# Altium PCB Baseboard.PcbDoc
Units mm, origin at the board's own origin, x right, y up, seen from the top; angles counter-clockwise.
Board outline 88 x 88 mm, 2 copper layers (Top Layer, Bottom Layer); 89 components, 67 nets, 411 pads, 11 vias.
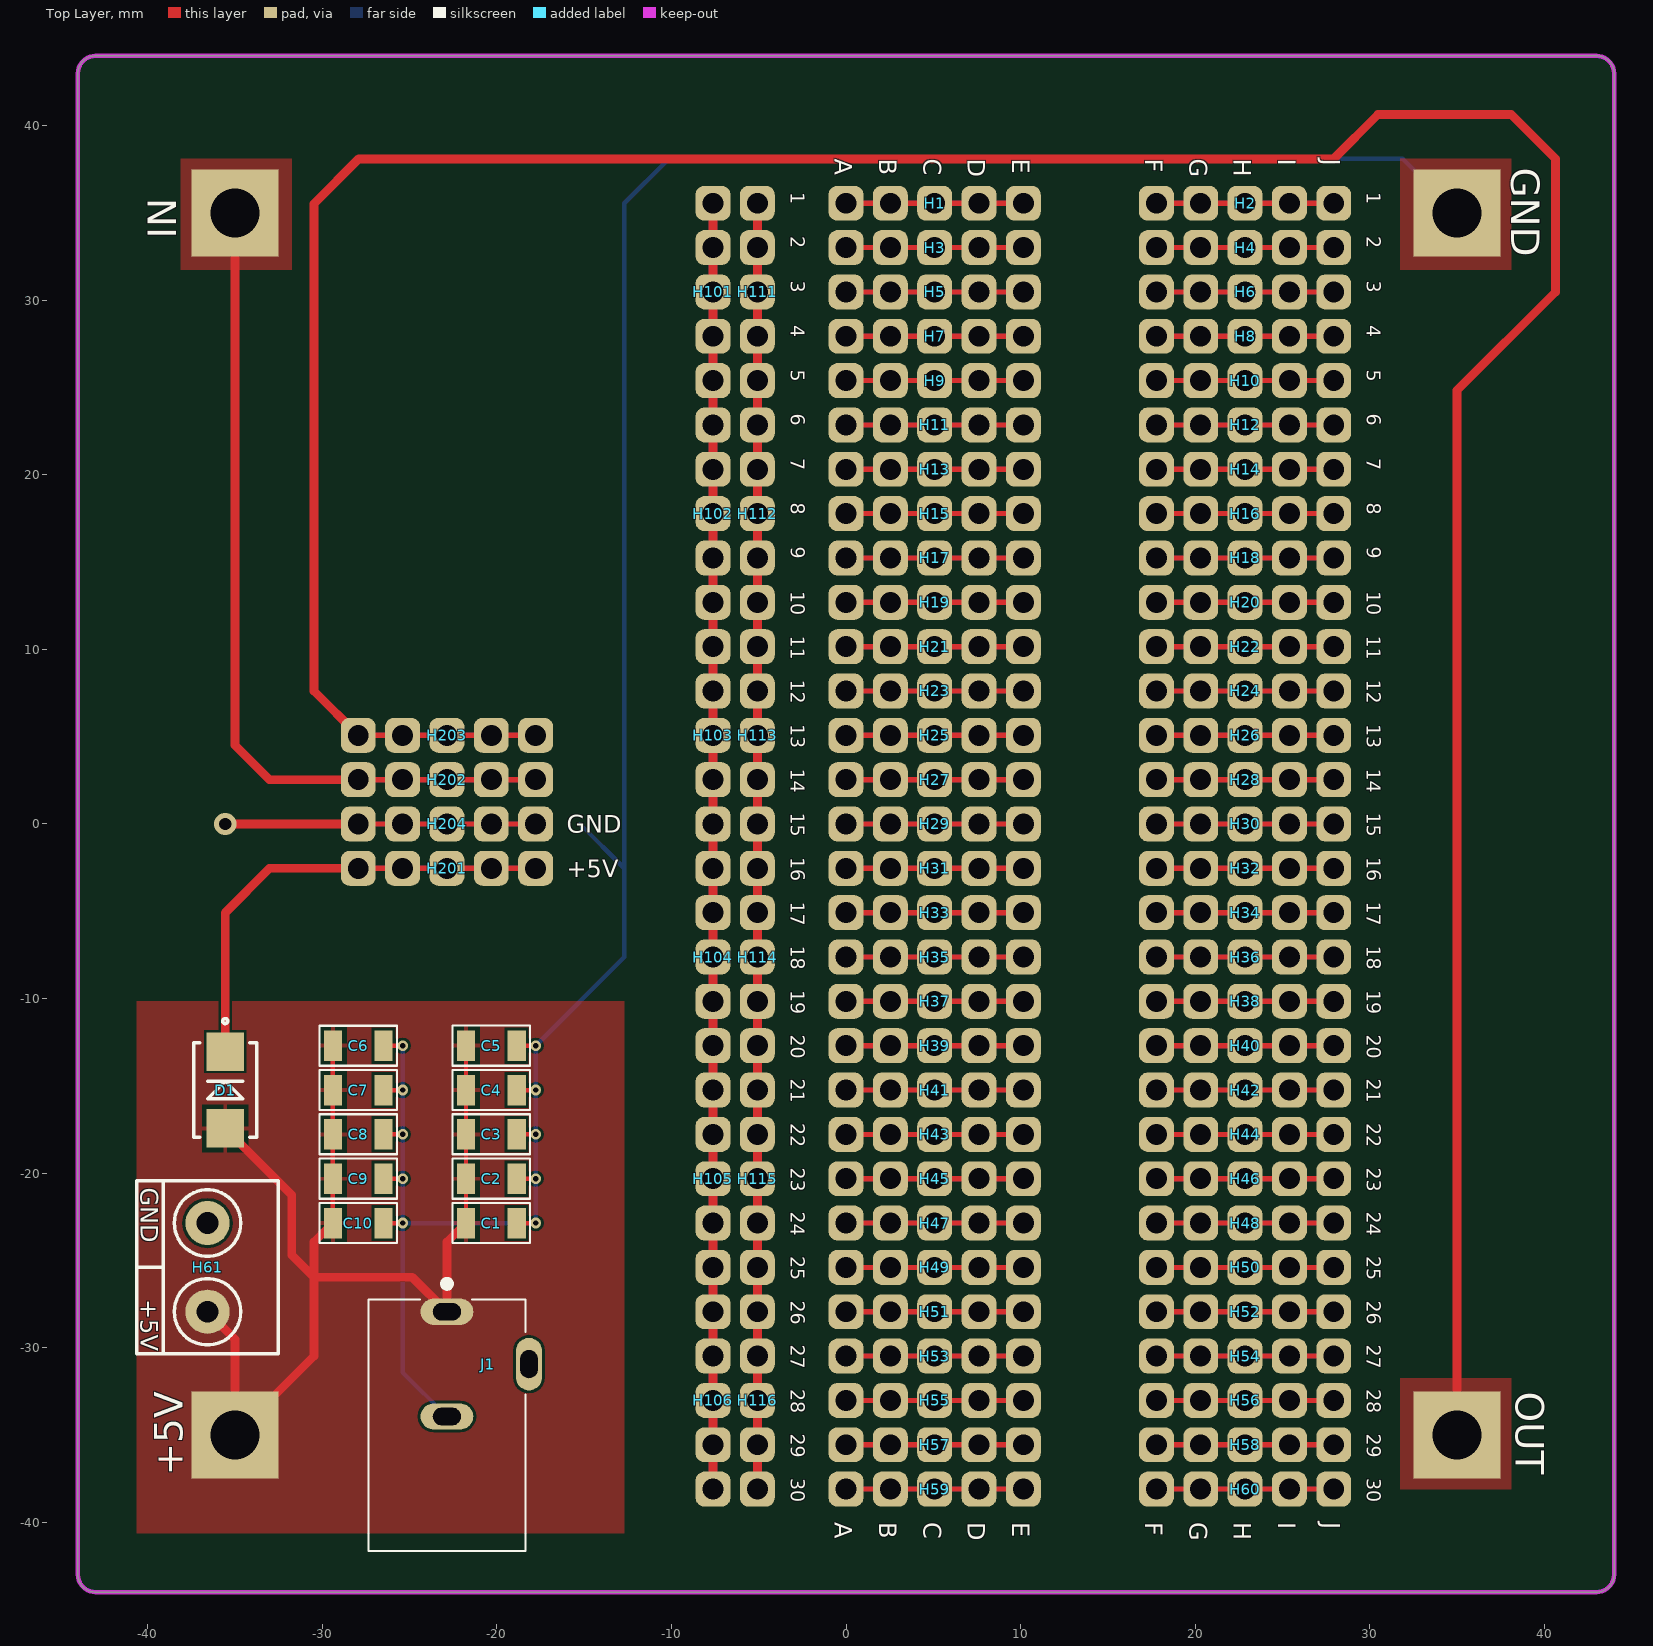
[diagram p0: Top Layer view]
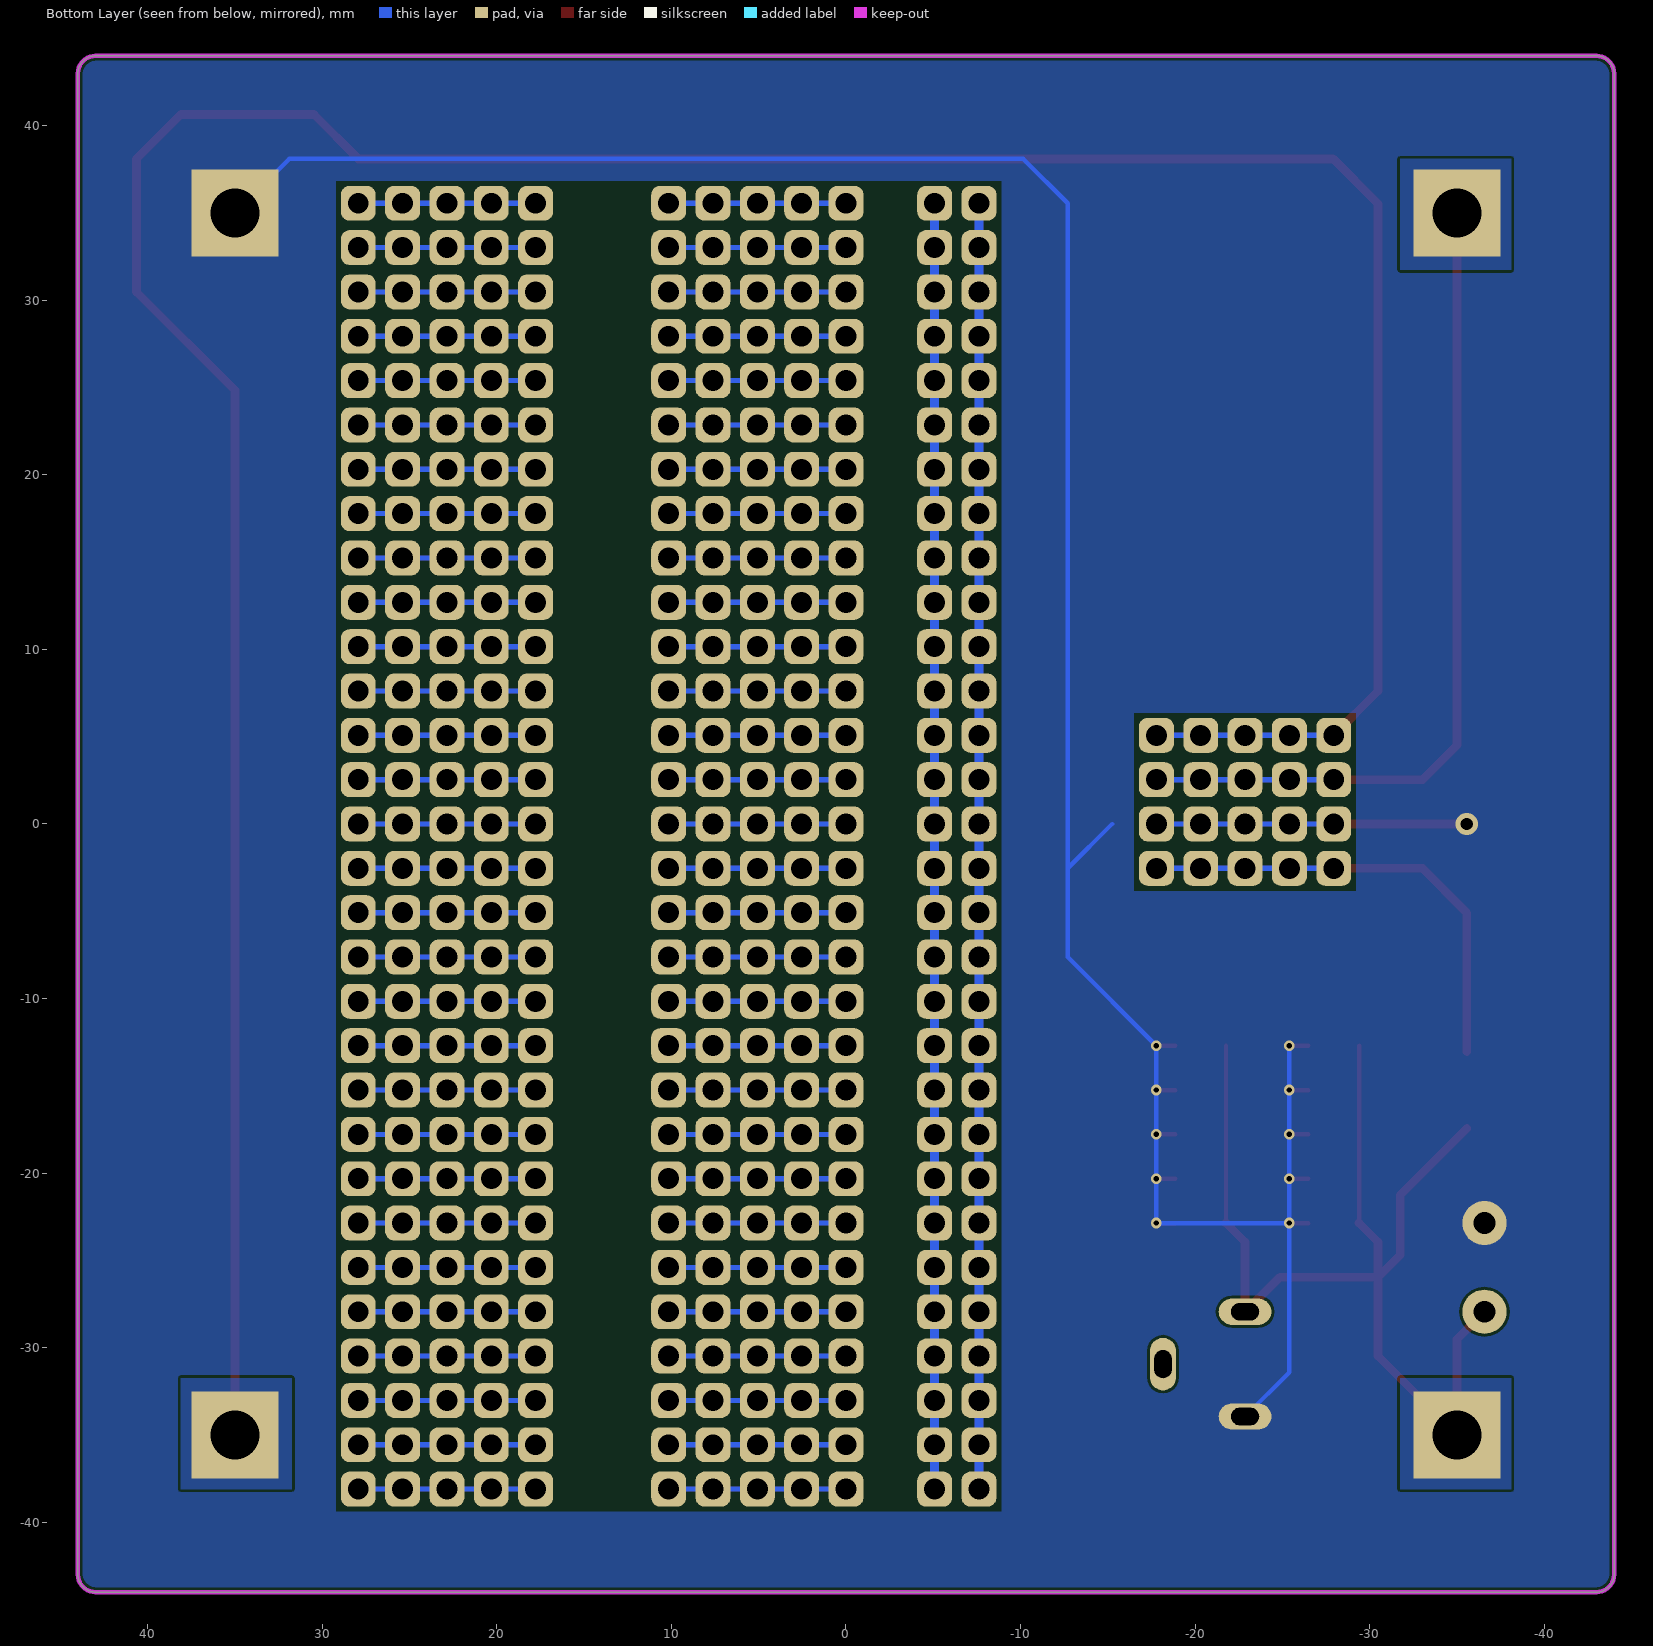
[diagram p1: Bottom Layer view, seen from below]

## Layer stack, top to bottom
Top Solder: solder mask 0.0102, Solder Resist, Dk 3.5
Top Layer: signal copper 0.0356
Dielectric 1: dielectric 0.32, FR-4, Dk 4.8
Bottom Layer: signal copper 0.0356
Bottom Solder: solder mask 0.0102, Solder Resist, Dk 3.5

## Board outline
-44,-43 ccw(c-43,-43) -43,-44 43,-44 ccw(c43,-43) 44,-43 44,43 ccw(c43,43) 43,44 -43,44 ccw(c-43,43) -44,43

## Design rules (kind name [scope] priority, off if disabled: settings)
Clearance [All] p1: gap=0.152 ignorepadtopadclearanceinfootprint=FALSE
PlaneConnect PC_PERCY [InNamedPolygon('DAVE') OR InNamedPolygon('Dave')] p1: planeconnectstyle=Direct reliefexpansion=0.508 reliefentries=4 reliefconductorwidth=0.254 reliefairgap=0.254
PlaneConnect [All] p2: planeconnectstyle=Relief reliefexpansion=0.508 reliefentries=4 reliefconductorwidth=0.254 reliefairgap=0.254
PolygonConnect VCC_PAD [IsNamedPolygon('VCC_PAD')] p1: connectstyle=Relief reliefconductorwidth=0.254 reliefentries=4 polygonreliefangle="90 Angle" airgapwidth=0.254
PolygonConnect [All] p2: connectstyle=Direct reliefconductorwidth=0.254 reliefentries=4 polygonreliefangle="90 Angle" airgapwidth=0.254
RoutingVias [All] p1: holewidth=0.305 width=0.61 viastyle="Through Hole" minholewidth=0.305 minwidth=0.61 maxholewidth=2.54 maxwidth=2.54
SolderMaskExpansion [All] p1: expansion=0.102
UnRoutedNet [All] p1: checkbadconnections=TRUE
Width [All] p1: maxlimit=0.508 minlimit=0.203 preferedwidth=0.254
28 further rules are at their usual default settings.

## Components (designator, comment, footprint, x,y, rotation, side; value= is the part's Value field where it differs from the comment)
C1 "CAP" C1206 -20.32,-22.86 r180 top
C2 "CAP" C1206 -20.32,-20.32 r0 top
C3 "CAP" C1206 -20.32,-17.78 r0 top
C4 "CAP" C1206 -20.32,-15.24 r0 top
C5 "CAP" C1206 -20.32,-12.7 r0 top
C6 "CAP" C1206 -27.94,-12.7 r180 top
C7 "CAP" C1206 -27.94,-15.24 r0 top
C8 "CAP" C1206 -27.94,-17.78 r0 top
C9 "CAP" C1206 -27.94,-20.32 r0 top
C10 "CAP" C1206 -27.94,-22.86 r0 top
D1 "STPS2L30A" STPS2L30A -35.56,-15.24 r270 top
H1 "1x5-row" 1x5-row 10.16,35.56 r180 top
H2 "1x5-row" 1x5-row 17.78,35.56 r0 top
H3 "1x5-row" 1x5-row 10.16,33.02 r180 top
H4 "1x5-row" 1x5-row 27.94,33.02 r180 top
H5 "1x5-row" 1x5-row 10.16,30.48 r180 top
H6 "1x5-row" 1x5-row 27.94,30.48 r180 top
H7 "1x5-row" 1x5-row 10.16,27.94 r180 top
H8 "1x5-row" 1x5-row 27.94,27.94 r180 top
H9 "1x5-row" 1x5-row 10.16,25.4 r180 top
H10 "1x5-row" 1x5-row 27.94,25.4 r180 top
H11 "1x5-row" 1x5-row 10.16,22.86 r180 top
H12 "1x5-row" 1x5-row 27.94,22.86 r180 top
H13 "1x5-row" 1x5-row 10.16,20.32 r180 top
H14 "1x5-row" 1x5-row 27.94,20.32 r180 top
H15 "1x5-row" 1x5-row 10.16,17.78 r180 top
H16 "1x5-row" 1x5-row 27.94,17.78 r180 top
H17 "1x5-row" 1x5-row 10.16,15.24 r180 top
H18 "1x5-row" 1x5-row 27.94,15.24 r180 top
H19 "1x5-row" 1x5-row 10.16,12.7 r180 top
H20 "1x5-row" 1x5-row 27.94,12.7 r180 top
H21 "1x5-row" 1x5-row 10.16,10.16 r180 top
H22 "1x5-row" 1x5-row 27.94,10.16 r180 top
H23 "1x5-row" 1x5-row 10.16,7.62 r180 top
H24 "1x5-row" 1x5-row 27.94,7.62 r180 top
H25 "1x5-row" 1x5-row 10.16,5.08 r180 top
H26 "1x5-row" 1x5-row 27.94,5.08 r180 top
H27 "1x5-row" 1x5-row 10.16,2.54 r180 top
H28 "1x5-row" 1x5-row 27.94,2.54 r180 top
H29 "1x5-row" 1x5-row 10.16,0 r180 top
H30 "1x5-row" 1x5-row 27.94,0 r180 top
H31 "1x5-row" 1x5-row 10.16,-2.54 r180 top
H32 "1x5-row" 1x5-row 27.94,-2.54 r180 top
H33 "1x5-row" 1x5-row 10.16,-5.08 r180 top
H34 "1x5-row" 1x5-row 27.94,-5.08 r180 top
H35 "1x5-row" 1x5-row 10.16,-7.62 r180 top
H36 "1x5-row" 1x5-row 27.94,-7.62 r180 top
H37 "1x5-row" 1x5-row 10.16,-10.16 r180 top
H38 "1x5-row" 1x5-row 27.94,-10.16 r180 top
H39 "1x5-row" 1x5-row 10.16,-12.7 r180 top
H40 "1x5-row" 1x5-row 27.94,-12.7 r180 top
H41 "1x5-row" 1x5-row 10.16,-15.24 r180 top
H42 "1x5-row" 1x5-row 27.94,-15.24 r180 top
H43 "1x5-row" 1x5-row 10.16,-17.78 r180 top
H44 "1x5-row" 1x5-row 27.94,-17.78 r180 top
H45 "1x5-row" 1x5-row 10.16,-20.32 r180 top
H46 "1x5-row" 1x5-row 27.94,-20.32 r180 top
H47 "1x5-row" 1x5-row 10.16,-22.86 r180 top
H48 "1x5-row" 1x5-row 27.94,-22.86 r180 top
H49 "1x5-row" 1x5-row 10.16,-25.4 r180 top
H50 "1x5-row" 1x5-row 27.94,-25.4 r180 top
H51 "1x5-row" 1x5-row 10.16,-27.94 r180 top
H52 "1x5-row" 1x5-row 27.94,-27.94 r180 top
H53 "1x5-row" 1x5-row 10.16,-30.48 r180 top
H54 "1x5-row" 1x5-row 27.94,-30.48 r180 top
H55 "1x5-row" 1x5-row 10.16,-33.02 r180 top
H56 "1x5-row" 1x5-row 27.94,-33.02 r180 top
H57 "1x5-row" 1x5-row 10.16,-35.56 r180 top
H58 "1x5-row" 1x5-row 27.94,-35.56 r180 top
H59 "1x5-row" 1x5-row 10.16,-38.1 r180 top
H60 "1x5-row" 1x5-row 27.94,-38.1 r180 top
H61 "282837-2" H_282837-2 -40.64,-25.4 r270 top
H101 "1x5-row" 1x5-row -7.62,25.4 r90 top
H102 "1x5-row" 1x5-row -7.62,12.7 r90 top
H103 "1x5-row" 1x5-row -7.62,0 r90 top
H104 "1x5-row" 1x5-row -7.62,-12.7 r90 top
H105 "1x5-row" 1x5-row -7.62,-25.4 r90 top
H106 "1x5-row" 1x5-row -7.62,-38.1 r90 top
H111 "1x5-row" 1x5-row -5.08,35.56 r270 top
H112 "1x5-row" 1x5-row -5.08,22.86 r270 top
H113 "1x5-row" 1x5-row -5.08,0 r90 top
H114 "1x5-row" 1x5-row -5.08,-12.7 r90 top
H115 "1x5-row" 1x5-row -5.08,-25.4 r90 top
H116 "1x5-row" 1x5-row -5.08,-38.1 r90 top
H201 "1x5-row" 1x5-row -27.94,-2.54 r0 top
H202 "1x5-row" 1x5-row -27.94,2.54 r0 top
H203 "1x5-row" 1x5-row -27.94,5.08 r0 top
H204 "1x5-row" 1x5-row -27.94,0 r0 top
J1 "PJ-102AH" PJ-102AH -22.86,-34.44 r270 top

## Footprints (in the part's own frame and the unit in brackets; to place one, negate y for a bottom-side part, rotate by r counter-clockwise, add the part's x,y. Pads: shape width x height; smd on the part's side, far side on the other; paste and mask are expansions set on the pad)
1x5-row [mm]
  rrect50% 2x2 hole 1.2: 1(0,0) 2(2.54,0) 3(5.08,0) 4(7.62,0) 5(10.16,0)
  Top Layer lines w0.3: 10.16,0 7.62,0 5.08,0 2.54,0 0,0
  Bottom Layer lines w0.3: 10.16,0 7.62,0 5.08,0 2.54,0 0,0
C1206 [mm]
  rect 1.05x1.75 smd: 1(-1.45,0) 2(1.45,0)
  silkscreen extent -2.23,-1.14 2.23,1.15, body extent -1.6,-0.8 1.6,0.8, height 1.2
H_282837-2 [mil] "TERMINAL BLOCK 2WAY"
  round 100 hole 49: 1(-100,160) 2(100,160)
  silkscreen extent -195,0 195,320, body extent -222,-3 202,320, height 404
PJ-102AH [mm]
  oval 1.508x3.016 hole 1 slot 1.6 at 90 deg: 1(-6.5,0) 2(-0.5,0)
  oval 3.016x1.508 hole 1 slot 1.6 at 0 deg: 3(-3.5,4.7)
  silkscreen extent -8.3,-4.5 7.2,4.5, body extent -7.2,-4.57 7.2,4.83, height 11.5
STPS2L30A [mm]
  rect 2.2x2.15 smd: A(2.2,0) K(-2.2,0)
  silkscreen extent -4.09,-1.8 2.7,1.8

## Part data
C1 C2 C3 C4 C5 C6 C7 C8 C9 C10: LCSC Part #=C1590, MF="Samsung Electro-Mechanics", MP=CL10B104KA8NNNC
D1: "Schottky Diode"
H61: "TERM BLK 2P SIDE ENT 5.08MM PCB", Supplier Part Number 1=A113320-ND, Supplier 1=Digi-Key
J1: "2.0 x 6.5 mm, 5.0 A, Horizontal, Through Hole, Tapered Pins, Dc Power Jack Connector", Package=None, CUI_purchase_URL=https://www.cuidevices.com/product/interconnect/connectors/dc-power-connectors/jacks/pj-102ah?utm_source=snapeda.com&utm_medium=referral&utm_campaign=snapedaBOM, Digi-Key_Part_Number=CP-102AH-ND, Digi-Key_Purchase_URL=https://www.digikey.com/product-detail/en/cui-devices/PJ-102AH/CP-102AH-ND/408448?utm_source=snapeda&utm_medium=aggregator&utm_campaign=symbol, MF="CUI Devices", MP=PJ-102AH, SnapEDA_Link=https://www.snapeda.com/parts/PJ-102AH/CUI%20Devices/view-part/228264/?ref=snap

## Free pads (board coordinates)
  rect 5x5 hole 2.8: ""(-35,-35) ""(-35,35) ""(35,-35) ""(35,35)

## Via types
v1: diameter 0.61, hole 0.305, Top Layer to Bottom Layer, tented both sides, 10 vias
v2: diameter 1.27, hole 0.711, Top Layer to Bottom Layer, tented both sides, 1 vias

## Nets (pads, with @x,y where several pads share a name; then routed paths per layer and width w, separated by ;. In a path a pad name is that pad's centre, name@x,y a point inside that pad or via, vN(x,y) a via of type N, cw(c..) or ccw(c..) an arc to the next point about the centre after c; other vN are vias at no path point)
+5: D1.K H201.1 H201.2 H201.3 H201.4 H201.5 | length 16.6
  Top Layer w0.5: D1.K -35.56,-5.08 -33.02,-2.54 H201.1
DIN: H202.1 H202.2 H202.3 H202.4 H202.5 pad.@-35,35 | length 38.4
  Top Layer w0.5: pad.@-35,35 -35,7.62 -35,4.52 -33.02,2.54 H202.1
DOUT: H203.1 H203.2 H203.3 H203.4 H203.5 pad.@35,-35 | length 181.2
  Top Layer w0.5: H203.1 -30.48,7.62 -30.48,35.535 -27.915,38.1 27.94,38.1 30.48,40.64 38.1,40.64 40.64,38.1 40.64,30.48 35,24.84 pad.@35,-35
GND: C1.1 C2.2 C3.2 C4.2 C5.2 C6.1 C7.2 C8.2 C9.2 C10.2 H61.1 H204.1 H204.2 H204.3 H204.4 H204.5 J1.2 pad.@35,35 | length 162.6
  Top Layer w0.254: C10.2 v1(-25.4,-22.86) ; C9.2 v1(-25.4,-20.32) ; C8.2 v1(-25.4,-17.78) ; C7.2 v1(-25.4,-15.24) ; C6.1 v1(-25.4,-12.7) ; C1.1 v1(-17.78,-22.86) ; C2.2 v1(-17.78,-20.32) ; C3.2 v1(-17.78,-17.78) ; C4.2 v1(-17.78,-15.24) ; C5.2 v1(-17.78,-12.7)
  Top Layer w0.508: v2(-35.56,0) H204.1
  Bottom Layer w0.254: v1(-25.4,-12.7) v1(-25.4,-15.24) v1(-25.4,-17.78) v1(-25.4,-20.32) v1(-25.4,-22.86) ; J1.2 -25.4,-31.4 v1(-25.4,-22.86) ; -15.24,0 -12.7,-2.54 ; pad.@35,35 31.9,38.1 -10.16,38.1 -12.7,35.56 -12.7,-2.54 ; v1(-25.4,-22.86) v1(-17.78,-22.86) v1(-17.78,-20.32) v1(-17.78,-17.78) v1(-17.78,-15.24) v1(-17.78,-12.7) -12.7,-7.62 -12.7,-2.54
NetH1_1: H1.1 H1.2 H1.3 H1.4 H1.5
NetH2_1: H2.1 H2.2 H2.3 H2.4 H2.5
NetH3_1: H3.1 H3.2 H3.3 H3.4 H3.5
NetH4_1: H4.1 H4.2 H4.3 H4.4 H4.5
NetH5_1: H5.1 H5.2 H5.3 H5.4 H5.5
NetH6_1: H6.1 H6.2 H6.3 H6.4 H6.5
NetH7_1: H7.1 H7.2 H7.3 H7.4 H7.5
NetH8_1: H8.1 H8.2 H8.3 H8.4 H8.5
NetH9_1: H9.1 H9.2 H9.3 H9.4 H9.5
NetH10_1: H10.1 H10.2 H10.3 H10.4 H10.5
NetH11_1: H11.1 H11.2 H11.3 H11.4 H11.5
NetH12_1: H12.1 H12.2 H12.3 H12.4 H12.5
NetH13_1: H13.1 H13.2 H13.3 H13.4 H13.5
NetH14_1: H14.1 H14.2 H14.3 H14.4 H14.5
NetH15_1: H15.1 H15.2 H15.3 H15.4 H15.5
NetH16_1: H16.1 H16.2 H16.3 H16.4 H16.5
NetH17_1: H17.1 H17.2 H17.3 H17.4 H17.5
NetH18_1: H18.1 H18.2 H18.3 H18.4 H18.5
NetH19_1: H19.1 H19.2 H19.3 H19.4 H19.5
NetH20_1: H20.1 H20.2 H20.3 H20.4 H20.5
NetH21_1: H21.1 H21.2 H21.3 H21.4 H21.5
NetH22_1: H22.1 H22.2 H22.3 H22.4 H22.5
NetH23_1: H23.1 H23.2 H23.3 H23.4 H23.5
NetH24_1: H24.1 H24.2 H24.3 H24.4 H24.5
NetH25_1: H25.1 H25.2 H25.3 H25.4 H25.5
NetH26_1: H26.1 H26.2 H26.3 H26.4 H26.5
NetH27_1: H27.1 H27.2 H27.3 H27.4 H27.5
NetH28_1: H28.1 H28.2 H28.3 H28.4 H28.5
NetH29_1: H29.1 H29.2 H29.3 H29.4 H29.5
NetH30_1: H30.1 H30.2 H30.3 H30.4 H30.5
NetH31_1: H31.1 H31.2 H31.3 H31.4 H31.5
NetH32_1: H32.1 H32.2 H32.3 H32.4 H32.5
NetH33_1: H33.1 H33.2 H33.3 H33.4 H33.5
NetH34_1: H34.1 H34.2 H34.3 H34.4 H34.5
NetH35_1: H35.1 H35.2 H35.3 H35.4 H35.5
NetH36_1: H36.1 H36.2 H36.3 H36.4 H36.5
NetH37_1: H37.1 H37.2 H37.3 H37.4 H37.5
NetH38_1: H38.1 H38.2 H38.3 H38.4 H38.5
NetH39_1: H39.1 H39.2 H39.3 H39.4 H39.5
NetH40_1: H40.1 H40.2 H40.3 H40.4 H40.5
NetH41_1: H41.1 H41.2 H41.3 H41.4 H41.5
NetH42_1: H42.1 H42.2 H42.3 H42.4 H42.5
NetH43_1: H43.1 H43.2 H43.3 H43.4 H43.5
NetH44_1: H44.1 H44.2 H44.3 H44.4 H44.5
NetH45_1: H45.1 H45.2 H45.3 H45.4 H45.5
NetH46_1: H46.1 H46.2 H46.3 H46.4 H46.5
NetH47_1: H47.1 H47.2 H47.3 H47.4 H47.5
NetH48_1: H48.1 H48.2 H48.3 H48.4 H48.5
NetH49_1: H49.1 H49.2 H49.3 H49.4 H49.5
NetH50_1: H50.1 H50.2 H50.3 H50.4 H50.5
NetH51_1: H51.1 H51.2 H51.3 H51.4 H51.5
NetH52_1: H52.1 H52.2 H52.3 H52.4 H52.5
NetH53_1: H53.1 H53.2 H53.3 H53.4 H53.5
NetH54_1: H54.1 H54.2 H54.3 H54.4 H54.5
NetH55_1: H55.1 H55.2 H55.3 H55.4 H55.5
NetH56_1: H56.1 H56.2 H56.3 H56.4 H56.5
NetH57_1: H57.1 H57.2 H57.3 H57.4 H57.5
NetH58_1: H58.1 H58.2 H58.3 H58.4 H58.5
NetH59_1: H59.1 H59.2 H59.3 H59.4 H59.5
NetH60_1: H60.1 H60.2 H60.3 H60.4 H60.5
NetH101_1: H101.1 H101.2 H101.3 H101.4 H101.5 H102.1 H102.2 H102.3 H102.4 H102.5 H103.1 H103.2 H103.3 H103.4 H103.5 H104.1 H104.2 H104.3 H104.4 H104.5 H105.1 H105.2 H105.3 H105.4 H105.5 H106.1 H106.2 H106.3 H106.4 H106.5 | length 147.3
  Top Layer w0.508: H106.1 H106.2 H106.3 H106.4 H106.5 H105.1 H105.2 H105.3 H105.4 H105.5 H104.1 H104.2 H104.3 H104.4 H104.5 H103.1 H103.2 H103.3 H103.4 H103.5 H102.1 H102.2 H102.3 H102.4 H102.5 H101.1 H101.2 H101.3 H101.4 H101.5
  Bottom Layer w0.508: H106.1 H106.2 H106.3 H106.4 H106.5 H105.1 H105.2 H105.3 H105.4 H105.5 H104.1 H104.2 H104.3 H104.4 H104.5 H103.1 H103.2 H103.3 H103.4 H103.5 H102.1 H102.2 H102.3 H102.4 H102.5 H101.1 H101.2 H101.3 H101.4 H101.5
NetH111_1: H111.1 H111.2 H111.3 H111.4 H111.5 H112.1 H112.2 H112.3 H112.4 H112.5 H113.1 H113.2 H113.3 H113.4 H113.5 H114.1 H114.2 H114.3 H114.4 H114.5 H115.1 H115.2 H115.3 H115.4 H115.5 H116.1 H116.2 H116.3 H116.4 H116.5 | length 147.3
  Top Layer w0.508: H116.1 H116.2 H116.3 H116.4 H116.5 H115.1 H115.2 H115.3 H115.4 H115.5 H114.1 H114.2 H114.3 H114.4 H114.5 H113.1 H113.2 H113.3 H113.4 H113.5 H112.5 H112.4 H112.3 H112.2 H112.1 H111.5 H111.4 H111.3 H111.2 H111.1
  Bottom Layer w0.508: H116.1 H116.2 H116.3 H116.4 H116.5 H115.1 H115.2 H115.3 H115.4 H115.5 H114.1 H114.2 H114.3 H114.4 H114.5 H113.1 H113.2 H113.3 H113.4 H113.5 H112.5 H112.4 H112.3 H112.2 H112.1 H111.5 H111.4 H111.3 H111.2 H111.1
VCC: C1.2 C2.1 C3.1 C4.1 C5.1 C6.2 C7.1 C8.1 C9.1 C10.1 D1.A H61.2 J1.1 pad.@-35,-35 | length 67.1
  Top Layer w0.254: C10.1 C9.1 C8.1 C7.1 C6.2 ; C1.2 C2.1 C3.1 C4.1 C5.1
  Top Layer w0.5: H61.2 -35,-29.516 -35,-35 -30.48,-30.48 -30.48,-25.96 ; D1.A -31.75,-21.25 -31.75,-24.69 -30.48,-25.96 ; C10.1 -30.48,-23.95 -30.48,-25.96 ; C1.2 -22.86,-23.95 J1.1 -24.84,-25.96 -30.48,-25.96
pads on no net: J1.3

## Polygon pours and split planes (outlines as drawn)
VCC on Top Layer "DAVE" (solid, pour order 136): -39.37,-25.96 -34.29,-25.96 -34.29,-29.977 -39.37,-29.977
VCC on Top Layer "VCC_PAD" (solid, pour order 134): -40.64,-40.64 -12.7,-40.64 -12.7,-10.16 -40.64,-10.16
VCC on Top Layer "PERCY" (solid, pour order 130): -24.84,-26.67 -20.955,-26.67 -20.955,-29.21 -24.84,-29.21
DOUT on Top Layer "Top Layer-DOUT" (solid, pour order 120): 31.75,-31.75 38.1,-31.75 38.1,-38.1 31.75,-38.1
DIN on Top Layer "Top Layer-DIN" (solid, pour order 118): -38.1,38.1 -38.1,31.75 -31.75,31.75 -31.75,38.1
GND on Top Layer "Top +5" (solid, remove dead copper, pour order 18): 31.75,31.75 38.1,31.75 38.1,38.1 31.75,38.1
VCC on Top Layer "Top GND" (solid, remove dead copper, pour order 20): -31.75,-31.75 -38.5,-31.75 -38.5,-38.1 -31.75,-38.1
GND on Bottom Layer "Bottom Layer-GND" (solid, remove dead copper, pour order 126): -44.45,44.45 44.45,44.45 44.45,-44.45 -44.45,-44.45
DIN on Bottom Layer "Bottom Layer-DIN" (solid, pour order 124): -38.1,38.1 -38.1,31.75 -31.75,31.75 -31.75,38.1
DOUT on Bottom Layer "Bottom Layer-DOUT" (solid, pour order 122): 31.75,-31.75 31.75,-38.1 38.1,-38.1 38.1,-31.75
VCC on Bottom Layer "Bottom GND" (solid, remove dead copper, pour order 16): -31.75,-31.75 -38.1,-31.75 -38.1,-38.1 -31.75,-38.1
GND on Bottom Layer "Bottom +5" (solid, remove dead copper, pour order 14): 31.75,31.75 38.1,31.75 38.1,38.1 31.75,38.1

## Keep-outs
Keep-Out Layer:
  the board outline again, w0.254

## Other copper
Bottom Layer:
  pour cut-out: -16.51,-3.81 -16.51,6.35 -29.21,6.35 -29.21,-3.81
  pour cut-out: -8.89,36.83 29.21,36.83 29.21,-39.37 -8.89,-39.37

## Silkscreen, mask and mechanical layers (free items; w line width, h text height)
Top Overlay:
  text "A" at -0.635,38.1 h1 r270
  text "B" at 1.905,38.1 h1 r270
  text "C" at 4.445,38.1 h1 r270
  text "D" at 6.985,38.1 h1 r270
  text "E" at 9.525,38.1 h1 r270
  text "F" at 17.145,38.1 h1 r270
  text "G" at 19.685,38.1 h1 r270
  text "H" at 22.225,38.1 h1 r270
  text "I" at 24.765,38.1 h1 r270
  text "J" at 27.305,38.1 h1 r270
  text "GND" at 38.1,37.592 h1.63 r270
  text "1" at -3.175,36.195 h0.8 r270
  text "1" at 29.845,36.195 h0.8 r270
  text "2" at -3.175,33.655 h0.8 r270
  text "2" at 29.845,33.655 h0.8 r270
  text "IN" at -38.354,33.528 h1.63 r90
  text "3" at -3.175,31.115 h0.8 r270
  text "3" at 29.845,31.115 h0.8 r270
  text "4" at -3.175,28.575 h0.8 r270
  text "4" at 29.845,28.575 h0.8 r270
  text "5" at -3.175,26.035 h0.8 r270
  text "5" at 29.845,26.035 h0.8 r270
  text "6" at -3.175,23.495 h0.8 r270
  text "6" at 29.845,23.495 h0.8 r270
  text "7" at -3.175,20.955 h0.8 r270
  text "7" at 29.845,20.955 h0.8 r270
  text "8" at -3.175,18.415 h0.8 r270
  text "8" at 29.845,18.415 h0.8 r270
  text "9" at -3.175,15.875 h0.8 r270
  text "9" at 29.845,15.875 h0.8 r270
  text "10" at -3.175,13.335 h0.8 r270
  text "10" at 29.845,13.335 h0.8 r270
  text "11" at -3.175,10.795 h0.8 r270
  text "11" at 29.845,10.795 h0.8 r270
  text "12" at -3.175,8.255 h0.8 r270
  text "12" at 29.845,8.255 h0.8 r270
  text "13" at -3.175,5.715 h0.8 r270
  text "13" at 29.845,5.715 h0.8 r270
  text "14" at -3.175,3.175 h0.8 r270
  text "14" at 29.845,3.175 h0.8 r270
  text "15" at -3.175,0.635 h0.8 r270
  text "15" at 29.845,0.635 h0.8 r270
  text "GND" at -16.002,-0.508 h1
  text "16" at -3.175,-1.905 h0.8 r270
  text "16" at 29.845,-1.905 h0.8 r270
  text "+5V" at -16.002,-3.048 h1
  text "17" at -3.175,-4.445 h0.8 r270
  text "17" at 29.845,-4.445 h0.8 r270
  text "18" at -3.175,-6.985 h0.8 r270
  text "18" at 29.845,-6.985 h0.8 r270
  text "19" at -3.175,-9.525 h0.8 r270
  text "19" at 29.845,-9.525 h0.8 r270
  text "20" at -3.175,-12.065 h0.8 r270
  text "20" at 29.845,-12.065 h0.8 r270
  text "21" at -3.175,-14.605 h0.8 r270
  text "21" at 29.845,-14.605 h0.8 r270
  text "22" at -3.175,-17.145 h0.8 r270
  text "22" at 29.845,-17.145 h0.8 r270
  text "23" at -3.175,-19.685 h0.8 r270
  text "23" at 29.845,-19.685 h0.8 r270
  text "GND" at -40.386,-20.828 h1 r270
  text "24" at -3.175,-22.225 h0.8 r270
  text "24" at 29.845,-22.225 h0.8 r270
  text "25" at -3.175,-24.765 h0.8 r270
  text "25" at 29.845,-24.765 h0.8 r270
  text "+5V" at -40.386,-27.221 h1 r270
  text "26" at -3.175,-27.305 h0.8 r270
  text "26" at 29.845,-27.305 h0.8 r270
  text "27" at -3.175,-29.845 h0.8 r270
  text "27" at 29.845,-29.845 h0.8 r270
  text "28" at -3.175,-32.385 h0.8 r270
  text "28" at 29.845,-32.385 h0.8 r270
  text "OUT" at 38.354,-32.512 h1.63 r270
  text "29" at -3.175,-34.925 h0.8 r270
  text "29" at 29.845,-34.925 h0.8 r270
  text "+5V" at -37.991,-37.338 h1.63 r90
  text "30" at -3.175,-37.465 h0.8 r270
  text "30" at 29.845,-37.465 h0.8 r270
  text "A" at -0.635,-40.005 h1 r270
  text "B" at 1.905,-40.005 h1 r270
  text "C" at 4.445,-40.005 h1 r270
  text "D" at 6.985,-40.005 h1 r270
  text "E" at 9.525,-40.005 h1 r270
  text "F" at 17.145,-40.005 h1 r270
  text "G" at 19.685,-40.005 h1 r270
  text "H" at 22.225,-40.005 h1 r270
  text "I" at 24.765,-40.005 h1 r270
  text "J" at 27.305,-40.005 h1 r270
Mechanical 1:
  the board outline again, w0.254